# Altium PCB rj_11_v3.PcbDoc
Units mm, origin at the board's own origin, x right, y up, seen from the top; angles counter-clockwise.
Board outline 19.7 x 22.1 mm, 2 copper layers (Top, Bottom); 58 components, 27 nets, 70 pads, 10 vias.
Unrouted connection lines stored in the file: 8.
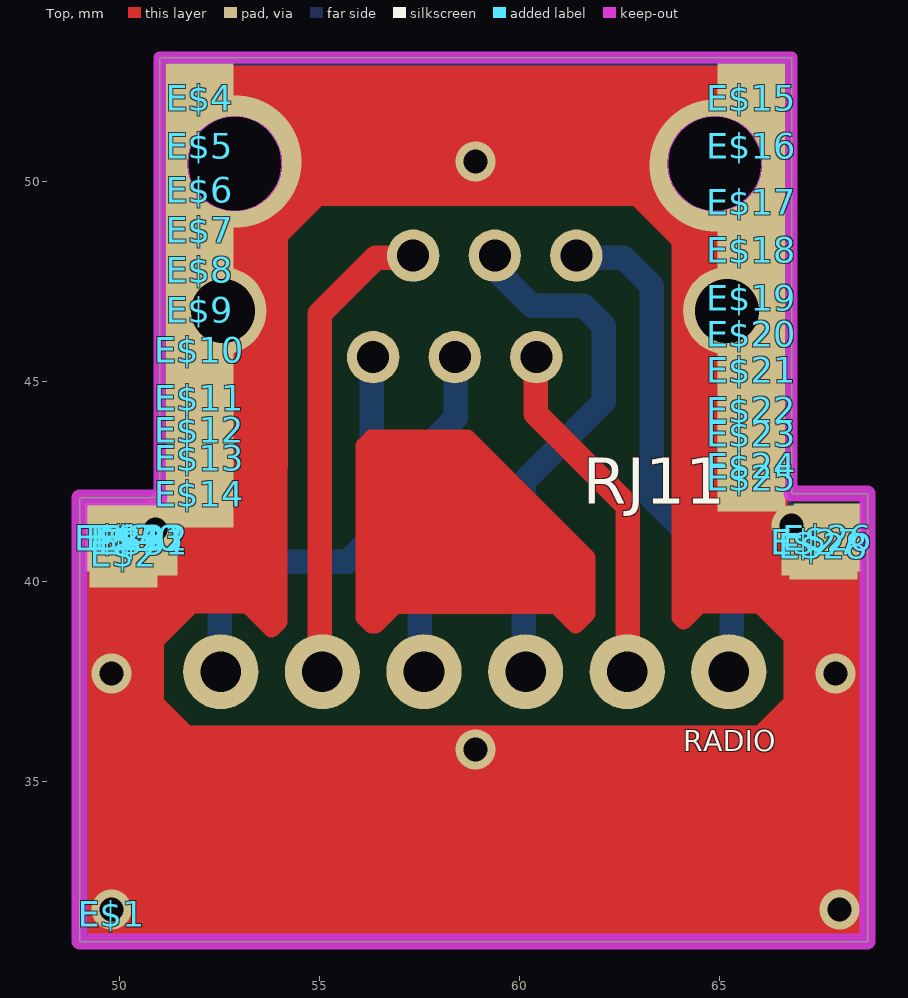
[diagram p0: Top view]
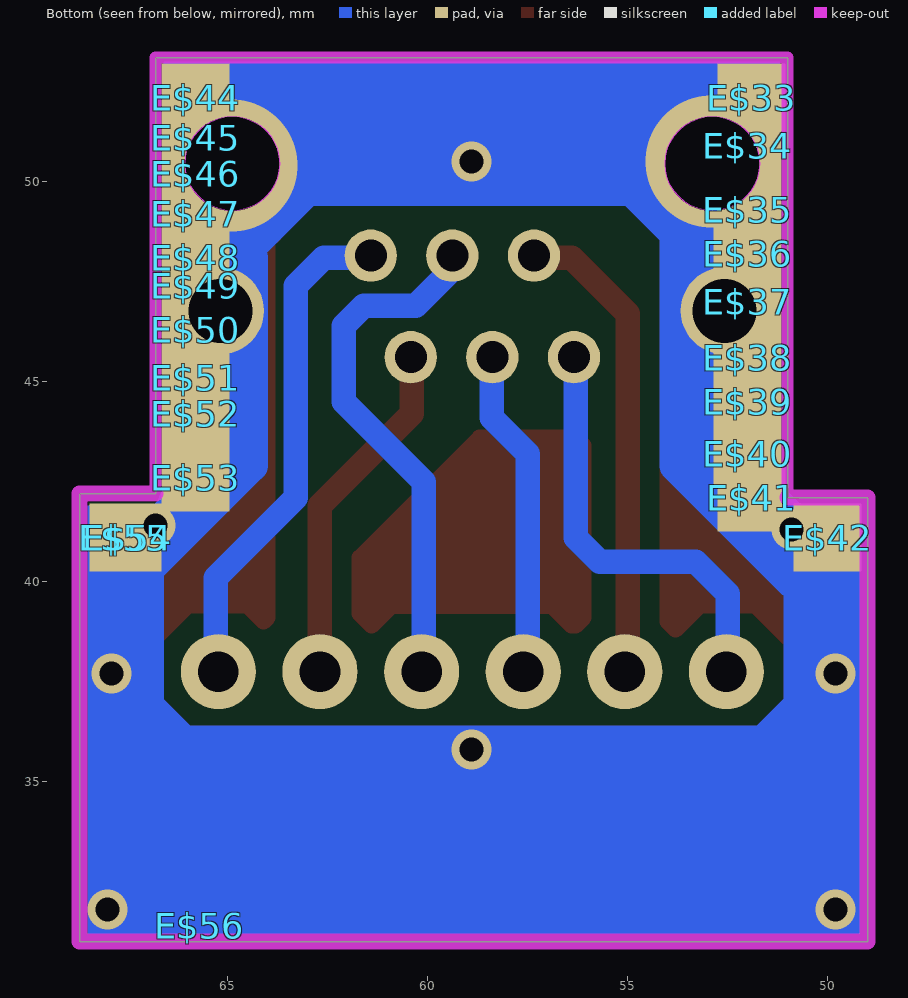
[diagram p1: Bottom view, seen from below]

## Layer stack, top to bottom
Top Solder: solder mask 0.0102, Solder Resist, Dk 3.5
Top: signal copper 0.035
Dielectric 1: dielectric 0.32, FR-4, Dk 4.8
Bottom: signal copper 0.035
Bottom Solder: solder mask 0.0102, Solder Resist, Dk 3.5

## Board outline
49,31 68.7,31 68.7,42.2 66.8,42.2 66.8,53.1 51,53.1 51,42.1 49,42.1
cut-out: 52.88,49.27 ccw(c52.88,50.45) 54.06,50.45 ccw(c52.88,50.45) 52.88,51.63 ccw(c52.88,50.45) 51.7,50.45 ccw(c52.88,50.45)
cut-out: 64.88,49.27 ccw(c64.88,50.45) 66.06,50.45 ccw(c64.88,50.45) 64.88,51.63 ccw(c64.88,50.45) 63.7,50.45 ccw(c64.88,50.45)

## Design rules (kind name [scope] priority, off if disabled: settings)
BoardOutlineClearance mdCopperDimension [All] p1: gap=0.254 ignorepadtopadclearanceinfootprint=FALSE except(0: Arc-SplitContinuation Track-SplitContinuation SMDPad-SplitContinuation THPad-SplitContinuation Via-SplitContinuation Fill-SplitContinuation Poly-SplitContinuation Region-SplitContinuation Text-SplitContinuation; 1.016: Poly-OutlineEdge Poly-CavityEdge Poly-CutoutEdge Poly-SplitBarrior)
Clearance "Clearance (Same Net)" [All] p1: gap=0.203 ignorepadtopadclearanceinfootprint=FALSE
Clearance [All] p2: gap=0.203 ignorepadtopadclearanceinfootprint=FALSE
HoleSize [All] p1: absolutevalues=TRUE maxlimit=2540 minlimit=0.61 maxpercent=80.000 minpercent=20.000
HoleToHoleClearance mdDrill [All] p1: gap=0.203 allowstackedmicrovias=TRUE
MinimumSolderMaskSliver [All] p1 off: minsoldermaskwidth=0.254
PasteMaskExpansion Expansion_SMDPaste_OFF [InPadClass('SMDPaste_OFF')] p1: expansion=0
PasteMaskExpansion mlMinCreamFrame [All] p2: expansion=0
PolygonConnect ThermalVias [IsVia] p1: connectstyle=Direct reliefconductorwidth=0.254 reliefentries=4 polygonreliefangle="90 Angle" airgapwidth=0.254
PolygonConnect [All] p2: connectstyle=Relief reliefconductorwidth=0.254 reliefentries=4 polygonreliefangle="90 Angle" airgapwidth=0.254
RoutingVias [All] p1: holewidth=0.61 width=1.016 viastyle="Through Hole" minholewidth=0.61 minwidth=1.016 maxholewidth=2.54 maxwidth=2.54
SolderMaskExpansion mlMinStopFrame [All] p1: expansion=0.102 istentingtop=FALSE
Width [All] p1: maxlimit=254 minlimit=0.254 preferedwidth=0.254
26 further rules are at their usual default settings.

## Classes and differential pairs
pad class SMDPaste_OFF: E$2-TP E$3-TP E$4-TP E$5-TP E$6-TP E$7-TP E$8-TP E$9-TP E$10-TP E$11-TP E$12-TP E$13-TP E$14-TP E$15-TP E$16-TP E$17-TP E$18-TP E$19-TP E$20-TP E$21-TP E$22-TP E$23-TP E$24-TP E$25-TP E$26-TP E$27-TP E$28-TP E$29-TP E$30-TP E$31-TP E$32-TP E$33-TP E$34-TP E$35-TP E$36-TP E$37-TP E$38-TP E$39-TP E$40-TP E$41-TP E$42-TP E$43-TP E$44-TP E$45-TP E$46-TP E$47-TP E$48-TP E$49-TP E$50-TP E$51-TP E$52-TP E$53-TP E$54-TP E$55-TP

## Components (designator, comment, footprint, x,y, rotation, side; value= is the part's Value field where it differs from the comment)
E$1 "" RF2 49.8,31.7 r0 top
E$2 "" TP17SQ 50.1,40.7 r0 top
E$3 "" TP17SQ 50,41.1 r0 top
E$4 "" TP17SQ 52,52.1 r0 top
E$5 "" TP17SQ 52,50.9 r0 top
E$6 "" TP17SQ 52,49.8 r0 top
E$7 "" TP17SQ 52,48.8 r0 top
E$8 "" TP17SQ 52,47.8 r0 top
E$9 "" TP17SQ 52,46.8 r0 top
E$10 "" TP17SQ 52,45.8 r0 top
E$11 "" TP17SQ 52,44.6 r0 top
E$12 "" TP17SQ 52,43.8 r0 top
E$13 "" TP17SQ 52,43.1 r0 top
E$14 "" TP17SQ 52,42.2 r0 top
E$15 "" TP17SQ 65.8,52.1 r0 top
E$16 "" TP17SQ 65.8,50.9 r0 top
E$17 "" TP17SQ 65.8,49.5 r0 top
E$18 "" TP17SQ 65.8,48.3 r0 top
E$19 "" TP17SQ 65.8,47.1 r0 top
E$20 "" TP17SQ 65.8,46.2 r0 top
E$21 "" TP17SQ 65.8,45.3 r0 top
E$22 "" TP17SQ 65.8,44.3 r0 top
E$23 "" TP17SQ 65.8,43.7 r0 top
E$24 "" TP17SQ 65.8,42.9 r0 top
E$25 "" TP17SQ 65.8,42.6 r0 top
E$26 "" TP17SQ 67.7,41.1 r0 top
E$27 "" TP17SQ 67.4,41 r0 top
E$28 "" TP17SQ 67.6,40.9 r0 top
E$29 "" TP17SQ 50,41.1 r0 top
E$30 "" TP17SQ 50.4,41.1 r0 top
E$31 "" TP17SQ 50.6,41 r0 top
E$32 "" TP17SQ 50.6,41.1 r0 top
E$33 "" TP17SQ 51.9,52.1 r180 bottom
E$34 "" TP17SQ 52,50.9 r180 bottom
E$35 "" TP17SQ 52,49.3 r180 bottom
E$36 "" TP17SQ 52,48.2 r180 bottom
E$37 "" TP17SQ 52,47 r180 bottom
E$38 "" TP17SQ 52,45.6 r180 bottom
E$39 "" TP17SQ 52,44.5 r180 bottom
E$40 "" TP17SQ 52,43.2 r180 bottom
E$41 "" TP17SQ 51.9,42.1 r180 bottom
E$42 "" TP17SQ 50,41.1 r180 bottom
E$43 "" TP17SQ 50.5,41.1 r0 top
E$44 "" TP17SQ 65.8,52.1 r180 bottom
E$45 "" TP17SQ 65.8,51.1 r180 bottom
E$46 "" TP17SQ 65.8,50.2 r180 bottom
E$47 "" TP17SQ 65.8,49.2 r180 bottom
E$48 "" TP17SQ 65.8,48.1 r180 bottom
E$49 "" TP17SQ 65.8,47.4 r180 bottom
E$50 "" TP17SQ 65.8,46.3 r180 bottom
E$51 "" TP17SQ 65.8,45.1 r180 bottom
E$52 "" TP17SQ 65.8,44.2 r180 bottom
E$53 "" TP17SQ 65.8,42.6 r180 bottom
E$54 "" TP17SQ 67.5,41.1 r180 bottom
E$55 "" TP17SQ 67.6,41.1 r180 bottom
E$56 "" EA5GVK1 65.7,31.4 r180 bottom
RADIO "" 1X06 65.23,37.75 r180 top
RJ11 "" YH-55-10 58.88,50.45 r180 top

## Footprints (in the part's own frame and the unit in brackets; to place one, negate y for a bottom-side part, rotate by r counter-clockwise, add the part's x,y. Pads: shape width x height; smd on the part's side, far side on the other; paste and mask are expansions set on the pad)
1X06 [mil] "1X06"
  round 74 hole 40: 1(0,0) 2(100,0) 3(200,0) 4(300,0) 5(400,0) 6(500,0)
EA5GVK1 [mm] "EA5GVK1"
RF2 [mm] "RF2"
TP17SQ [mm] "TP17SQ"
  rect 1.7x1.7 smd paste+0: TP(0,0)
YH-55-10 [mil] "YH-55-10"
  round 51.5 hole 31.5: 1(-100,90.55) 2(-60.63,190.55) 3(-19.69,90.55) 4(19.69,190.55) 5(60.63,90.55) 6(100,190.55)
  round 86 hole 62.99: S1(-248.03,144.88) S2(248.03,144.88)

## Part data
E$1: library part RF2, PackageName=RF2
E$2 E$3 E$4 E$5 E$6 E$7 E$8 E$9 E$10 E$11 E$12 E$13 E$14 E$15 E$16 E$17 E$18 E$19 E$20 E$21 E$22 E$23 E$24 E$25 E$26 E$27 E$28 E$29 E$30 E$31 E$32 E$33 E$34 E$35 E$36 E$37 E$38 E$39 E$40 E$41 E$42 E$43 E$44 E$45 E$46 E$47 E$48 E$49 E$50 E$51 E$52 E$53 E$54 E$55: library part TP17SQ, PackageName=TP17SQ
E$56: library part EA5GVK1, PackageName=EA5GVK1
RADIO: library part 1X06, PackageName=1X06
RJ11: library part YH-55-10, PackageName=YH-55-10

## Free pads (board coordinates)
  round 2.36 hole 2.36 unplated: MH1(64.88,50.45) MH2(52.88,50.45)

## Via types
v1: diameter 1.006/1.006 (per signal layer), hole 0.6, Top to Bottom, 8 vias
v2: diameter 3.3/3.3 (per signal layer), hole 2.2, Top to Bottom, 2 vias

## Nets (pads, with @x,y where several pads share a name; then routed paths per layer and width w, separated by ;. In a path a pad name is that pad's centre, name@x,y a point inside that pad or via, vN(x,y) a via of type N, cw(c..) or ccw(c..) an arc to the next point about the centre after c; other vN are vias at no path point)
S$1:  | length 12.2
  Bottom w0.61: 61.5,48.1 62.6,48.1 63.3,47.4 63.3,42.1 65.3,40.1 65.3,38.1
S$2:  | length 3
  Top w0.61: 62.7,37.8 62.7,40.8
S$3:  | length 12.7
  Bottom w0.61: 59.5,47.7 60.3,46.9 61.6,46.9 62.1,46.4 62.1,44.5 60.1,42.5 60.1,37.7
S$4:  | length 8
  Bottom w0.61: 57.5,37.9 57.5,43.2 58.4,44.1 58.4,45.4 58.5,45.5
S$5:  | length 11.7
  Top w0.61: 55,37.9 55,46.7 56.4,48.1 57.3,48.1
S$6:  | length 10.9
  Bottom w0.61: 52.4,37.8 52.5,37.9 52.5,39.7 53.3,40.5 55.7,40.5 56.3,41.1 56.3,45.7
S$7: 
  other v2: 64.9,50.4
S$8: 
  other v2: 52.9,50.5
S$9:  | length 27.4
  Bottom w0.406: 52.2,43.2 52.5,43.3 52.5,50.3
  Bottom w0.61: 52.5,46.8 52.5,50.3 52.8,50.6 64.7,50.6 65.1,50.2 65.1,46.5
S$10:  | length 9.2
  Bottom w0.406: 64.3,50.4 64.3,43.2 66.3,43.1
S$11: 
  other v1: 49.8,31.8 68,31.8 58.9,35.8 49.8,37.7 67.9,37.7 50.9,41.3 66.8,41.4 58.9,50.5
S$12:  | length 4.7
  Bottom w0.813: 50.5,40 50.5,37.1 51.8,35.8
S$13:  | length 2.2
  Bottom w0.813: 66.2,36.1 67.2,37.1 67.2,37.9
S$14:  | length 4.9
  Top w0.813: 50.6,40.3 50.6,37 51.7,35.9
S$15:  | length 8.7
  Top w0.61: 60.4,45.4 60.4,44.2 62.7,41.9 62.7,37.7
S$16:  | length 13.5
  Top w0.813: 51,41.8 52.1,42.9 53.2,42.9 50.9,40.6 50.9,40 53.8,42.9 53.8,43.5 52.4,44.9 52.4,45.2
S$17:  | length 13.5
  Bottom w0.813: 50.9,40 53.8,42.9 53.8,43.2 53.6,43 52.3,43 50.9,41.6 50.9,41 53.1,43.2 53.1,43.6 52.1,42.6
S$18:  | length 22.3
  Top w0.813: 65.7,43 65.9,42.8 65.9,42.3 65.3,42.9 64.4,42.9 67.1,40.2 67.2,40.2 66.3,41.1 66.3,42.8
  Bottom w0.813: 65.5,45.5 65.5,44.5 64.4,43.4 64.4,43 66.8,40.6 66.8,41.3 65.2,42.9 65.9,42.3 66.8,41.4 66.6,41.4 66.1,42.5
S$19:  | length 43.2
  Top w0.406: 64,48.8 64,39.1 64.1,39 65.1,40 ; 64.8,41.2 64.9,41.1 65.1,41.1 65,41 64.8,41 65,40.8 ; 65.2,40.8 65,40.8 ; 66.1,41 65.1,40 ; 66.5,40 66.3,40 ; 64.6,40.4 64.9,40.1 66.4,40.1 66.5,40.2 ; 64.6,40.4 64.6,41.7 ; 64.6,40.4 64.6,40 66.3,40 ; 64.6,41.7 66.3,40 ; 64.6,41.7 64.6,42.1 66.5,40.2 ; 65,40.8 64.8,40.8 64.9,40.7 65.4,40.7 65.3,40.6 64.9,40.6 65,40.5 65.4,40.5 65.3,40.4 64.8,40.4 65,40.2 66.5,40.2 ; 65.1,40 65.4,40 67.3,38.1 67.3,38.5 66.6,39.2 66.6,40.1 66.5,40.2
  Top w0.813: 61.3,50.6 62.2,50.6 64,48.8 65.1,47.7 ; 66.2,36.1 67.3,37.2 67.3,38.1 67.3,39.1
S$20:  | length 3.9
  Top w0.813: 53.6,48.5 55.6,50.5 56.7,50.5
S$21:  | length 26
  Bottom w0.813: 55.5,50.7 55.5,50.4 53.8,48.7 53.8,49 55.7,50.9 61.9,50.9 65,47.8 64.7,47.8 64.4,48.1 64.4,42.9 67.1,40.2
S$22:  | length 2.5
  Bottom w0.813: 52.2,43.6 52.2,46.1
S$23:  | length 0.7
  Top w0.813: 51.5,42.9 51.9,43.3 52,43.3
S$24:  | length 36.5
  Top w0.406: 52.5,43.3 54,43.3 54,39 53.8,38.8 52.7,39.9 ; 53,39.9 53.1,40 53.1,40.5 53,40.4 53,40.2 52.8,40 52.4,40 52.7,40.3 ; 53.1,40.7 52.7,40.3 ; 53.6,41.5 53.3,41.2 ; 53.6,42.4 53.6,39.3 ; 51.7,39.3 51.8,39.4 53.5,39.4 53.6,39.3 ; 51.7,39.3 51.4,39.3 50.7,38.6 50.7,38.3 51.7,39.3 ; 51.7,39.3 51.7,40.9 52.7,39.9 ; 52.7,39.9 52.7,40.3 ; 52.7,39.9 52,39.9 53.3,41.2 ; 53.3,41.2 53.3,39.7 53.2,39.6 51.3,39.6 51,39.3 50.9,39.3 53.8,42.2 53.8,42.4 53.7,42.3 53.7,39.2 53.6,39.3
S$25:  | length 12
  Top w0.406: 67.7,39.4 66.7,39.4 ; 66.7,39.4 66.4,39.7 64.5,39.7 64.3,39.9 64.3,42.5 64.2,42.4 64.2,39.3 64.3,39.4 66.7,39.4
S$26:  | length 24.3
  Top w0.406: 56.8,39.8 60.5,39.8 61.4,38.9 61.7,39.2 61.7,40.5 59.1,43.1 59.1,41.4 59.3,41.2 60.6,41.2 61.4,40.4 61.4,39.4 61.3,39.3 61.3,39.6 61.1,39.8 61.1,40.3 60.9,40.5 60.9,39.8 61.1,39.6 61.1,40.8 59.4,42.5 59.4,41.6 59.8,41.6 ; 60,41.7 59.9,41.8 59.6,41.8 59.8,41.6 ; 60.2,41.6 59.8,41.6
S$27:  | length 26.8
  Top w0.406: 56.4,39.2 56.4,43.4 56.5,43.3 58.8,43.3 61.5,40.6 61.7,40.6 58.7,43.6 56.3,43.6 56.1,43.4 56.1,39.1 56.3,38.9 56.4,38.9 57.3,39.8 60.6,39.8
pads on no net: E$2.TP E$3.TP E$4.TP E$5.TP E$6.TP E$7.TP E$8.TP E$9.TP E$10.TP E$11.TP E$12.TP E$13.TP E$14.TP E$15.TP E$16.TP E$17.TP E$18.TP E$19.TP E$20.TP E$21.TP E$22.TP E$23.TP E$24.TP E$25.TP E$26.TP E$27.TP E$28.TP E$29.TP E$30.TP E$31.TP E$32.TP E$33.TP E$34.TP E$35.TP E$36.TP E$37.TP E$38.TP E$39.TP E$40.TP E$41.TP E$42.TP E$43.TP E$44.TP E$45.TP E$46.TP E$47.TP E$48.TP E$49.TP E$50.TP E$51.TP E$52.TP E$53.TP E$54.TP E$55.TP RADIO.1 RADIO.2 RADIO.3 RADIO.4 RADIO.5 RADIO.6 RJ11.1 RJ11.2 RJ11.3 RJ11.4 RJ11.5 RJ11.6 RJ11.S1 RJ11.S2

## Keep-outs
Keep-Out Layer:
  the board outline again, w0.406

## Other copper
Top:
  region: 58.4,39.2 58.4,41.1 60.9,41.1 60.9,39.2
  region: 56,39.2 56,43.3 59.2,43.3 59.2,39.2
  region: 49.2,31.2 49.2,35.9 68.5,35.9 68.5,31.2
  region: 50.2,35.2 50.2,36 67.5,36 67.5,35.2
  region: 66.6,34.4 66.6,41.9 68.5,41.9 68.5,34.4
  region: 49.2,34 49.2,41.3 51.1,41.3 51.1,34
  region: 67.7,36.4 67.7,35.3 50,35.3 50,36.4
  region: 54.2,50.9 54.2,43.1 51.2,43.1 51.2,50.9
  region: 66.6,50.2 66.6,43 64,43 64,50.2
  region: 66.6,52.9 66.6,49.4 51.2,49.4 51.2,52.9
Bottom:
  region: 49.2,31.2 49.2,35.8 68.5,35.8 68.5,31.2
  region: 49.8,35.2 49.8,36.2 67,36.2 67,35.2
  region: 51.2,41.9 51.2,44.6 52,44.6 52,41.9
  region: 66.6,34.5 66.6,41.9 68.5,41.9 68.5,34.5
  region: 49.2,33.8 49.2,41.1 51.1,41.1 51.1,33.8
  region: 50,35.3 50,36.4 67.7,36.4 67.7,35.3
  region: 54.2,50.9 54.2,43.1 51.2,43.1 51.2,50.9
  region: 66.6,52.9 66.6,49.4 51.2,49.4 51.2,52.9
  region: 52.4,52.9 52.4,43.3 51.2,43.3 51.2,52.9
  region: 65.5,53 65.5,50.6 51.2,50.6 51.2,53
  region: 66.6,53 66.6,43.3 64.3,43.3 64.3,53

## Silkscreen, mask and mechanical layers (free items; w line width, h text height)
Dimension:
  the board outline again, w0.406
tPlace:
  text "PCB LOBO" at 56.5,51.5 h1.26
  text "by EA7GIB" at 53.861,32.664 h1.97
bPlace:
  text "PCB LOBO" at 61.5,51.5 h1.26

## Text inside footprints (layer, text, board x,y; h text height)
E$1: tPlace "C:/Users/User/Downloads/RF.bmp" at 49.8,31.625 h0.03
E$56: tPlace "C:/Users/user/Desktop/Untitled.bmp" at 65.7,31.325 h0.03